# EAGLE board ButtonBoard (EAGLE 9.6.2)
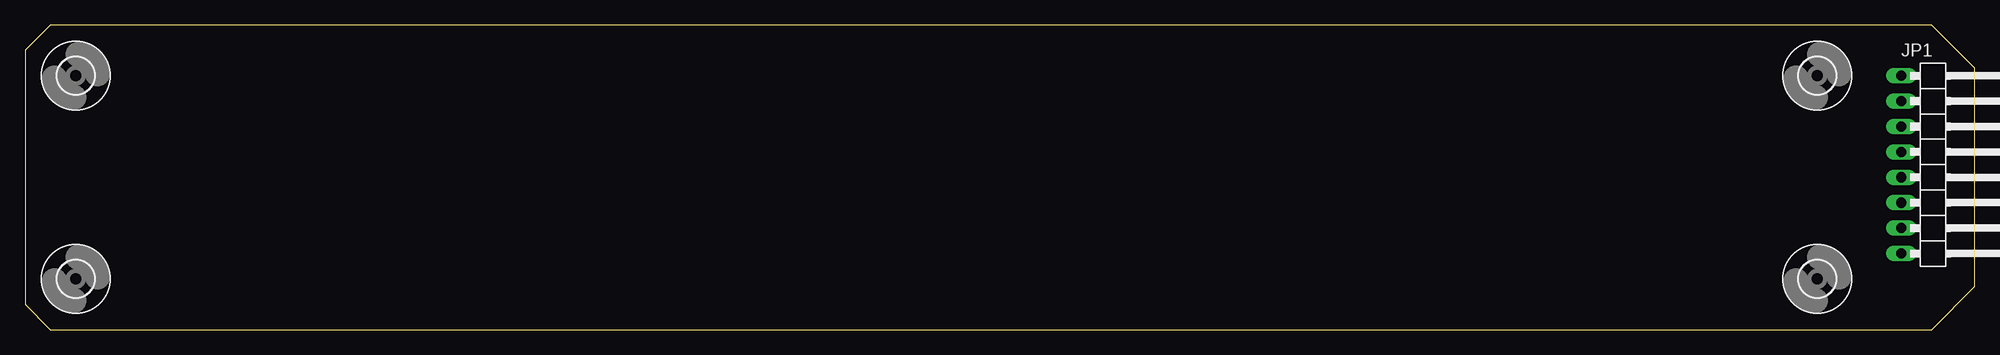
[diagram p0: board, top side]
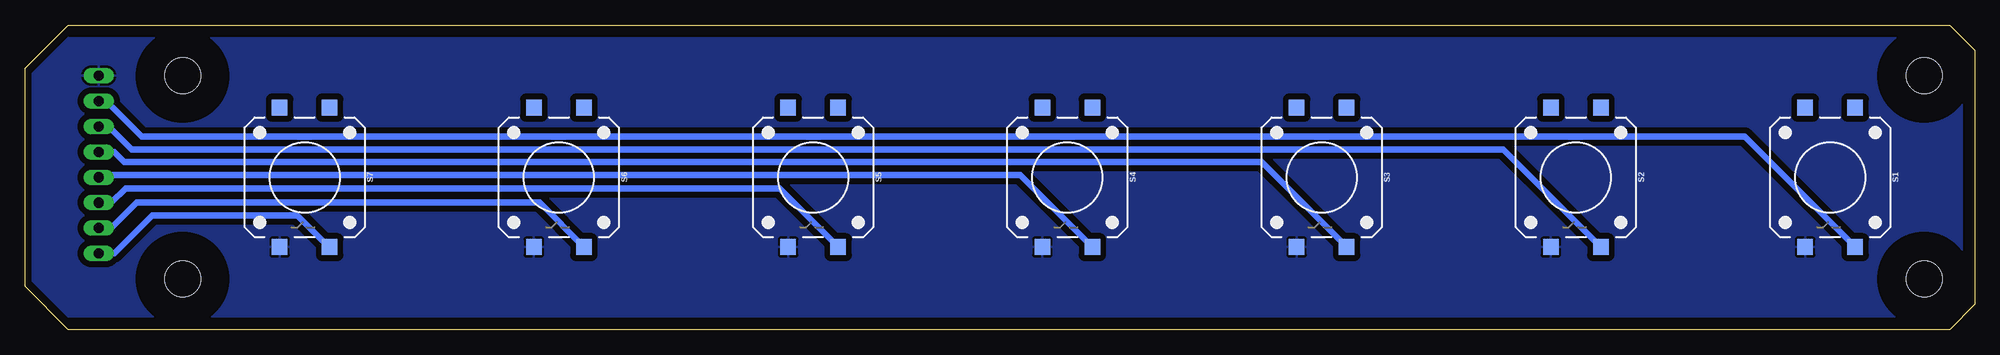
[diagram p1: board, bottom side, seen from below]

Size 194.82 x 30.48 mm. Coordinates in mm from the lower left corner, seen from the top.
Outline: 0,27.94 0,2.54 2.54,0 190.5,0 194.82,4.32 194.82,26.16 190.5,30.48 2.54,30.48 0,27.94
Copper layers (1*16): Top 0.035mm / dielectric 1.5mm / Bottom 0.035mm
Design rules "elcdrc": minimum track width 12mil, minimum drill 0.3mm, track to track 12mil, track to pad 12mil, pad to pad 12mil, via to via 12mil, smd to smd 6mil, copper to edge 12mil, drill to drill 12mil, minimum pad ring 10mil, minimum via ring 8mil, stop-mask expansion 4mil, vias tented up to drill 0mil, thermal gap 10mil

## Footprints (pad centres in the part's own frame; a part is rotated, then mirrored left to right if it is on the bottom)
1X08/90 = drill 1.016 long: 1 -8.89,-3.81; 2 -6.35,-3.81; 3 -3.81,-3.81; 4 -1.27,-3.81; 5 1.27,-3.81; 6 3.81,-3.81; 7 6.35,-3.81; 8 8.89,-3.81
TACTILE_SWITCH_SMD_12MM = smd 1.6 x 1.55: 1 6.975,-2.5; 2 -6.975,-2.5; 3 6.975,2.5; 4 -6.975,2.5
3,6 = hole 3.6: 0,0

## Placement (x,y rotation side)
JP1  [1X08/90]  191.26,16.51 270 top
S1  MOMENTARY-SWITCH-SPST-SMD-12MM  [TACTILE_SWITCH_SMD_12MM]  14.48,15.24 270 bottom
S2  MOMENTARY-SWITCH-SPST-SMD-12MM  [TACTILE_SWITCH_SMD_12MM]  39.88,15.24 270 bottom
S3  MOMENTARY-SWITCH-SPST-SMD-12MM  [TACTILE_SWITCH_SMD_12MM]  65.28,15.24 270 bottom
S4  MOMENTARY-SWITCH-SPST-SMD-12MM  [TACTILE_SWITCH_SMD_12MM]  90.68,15.24 270 bottom
S5  MOMENTARY-SWITCH-SPST-SMD-12MM  [TACTILE_SWITCH_SMD_12MM]  116.08,15.24 270 bottom
S6  MOMENTARY-SWITCH-SPST-SMD-12MM  [TACTILE_SWITCH_SMD_12MM]  141.48,15.24 270 bottom
S7  MOMENTARY-SWITCH-SPST-SMD-12MM  [TACTILE_SWITCH_SMD_12MM]  166.88,15.24 270 bottom
U$1  [3,6]  5.08,5.08 0 top
U$2  [3,6]  179.07,5.08 0 top
U$3  [3,6]  179.07,25.4 0 top
U$5  [3,6]  5.08,25.4 0 top

## Library data of the parts
JP1 = pinheadSpecial
S1-S7 = SparkFun-Switches; PROD_ID: SWCH-11967; SF_SKU: COM-12993
U$1-U$3 U$5 = holes

## Nets
GND: JP1.1 S1.1 S2.1 S3.1 S4.1 S5.1 S6.1 S7.1
MISC1: JP1.6 S5.3
MISC2: JP1.7 S6.3
MISC3: JP1.8 S7.3
PAUSE: JP1.4 S3.3
RESUME: JP1.5 S4.3
RST: JP1.2 S1.3
START: JP1.3 S2.3

## Tracks (layer width: path | path; a pad name or v marks a point on that pad's centre or on a via)
GND
  pour Bottom (isolate 0.61): 2.54,29.21 190.5,29.21 194.31,25.4 194.31,5.08 190.5,1.27 2.54,1.27 1.27,2.54 1.27,27.94
MISC1
  Bottom 0.635: JP1.6 186.18,12.7 184.76,14.12 119.44,14.12 S5.3
MISC2
  Bottom 0.635: JP1.7 186.18,10.16 183.64,12.7 143.41,12.7 S6.3
MISC3
  Bottom 0.635: JP1.8 185.93,7.62 182.12,11.43 167.64,11.43 164.47,8.27 S7.3
PAUSE
  Bottom 0.635: S3.3 71.28,16.76 184.91,16.76 185.93,17.78 JP1.4
RESUME
  Bottom 0.635: JP1.5 187.2,15.49 95.41,15.49 S4.3
RST
  Bottom 0.635: S1.3 23.02,19.3 183.13,19.3 186.69,22.86 JP1.2
START
  Bottom 0.635: S2.3 47.15,18.03 184.15,18.03 186.44,20.32 JP1.3